# EAGLE board macropad_synthplug (EAGLE 9.6.2)
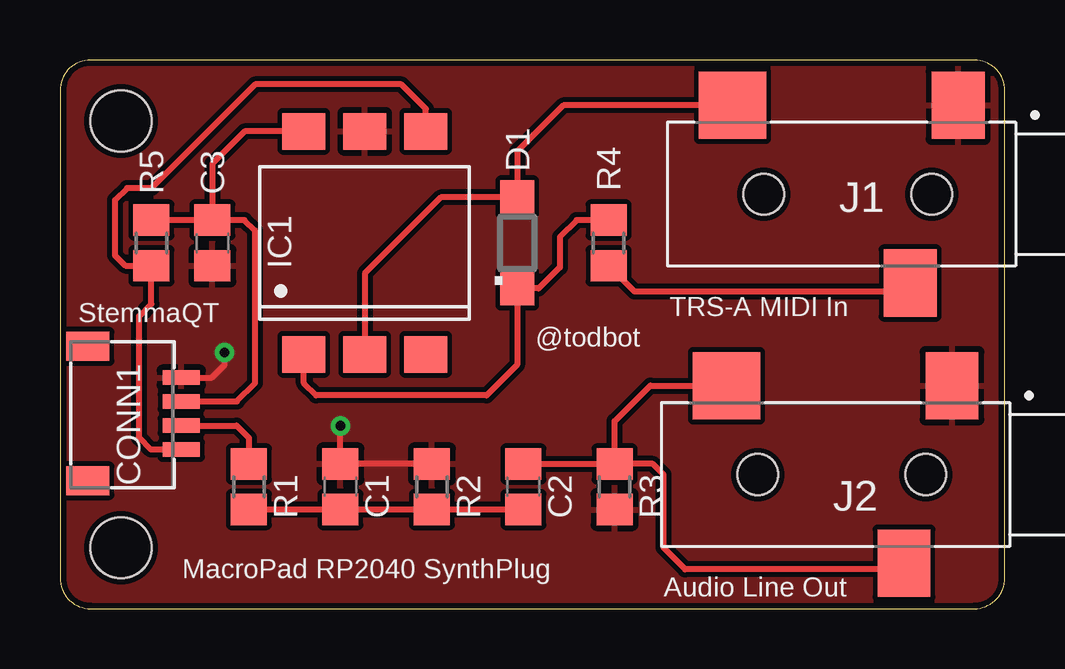
[diagram p0: board, top side]
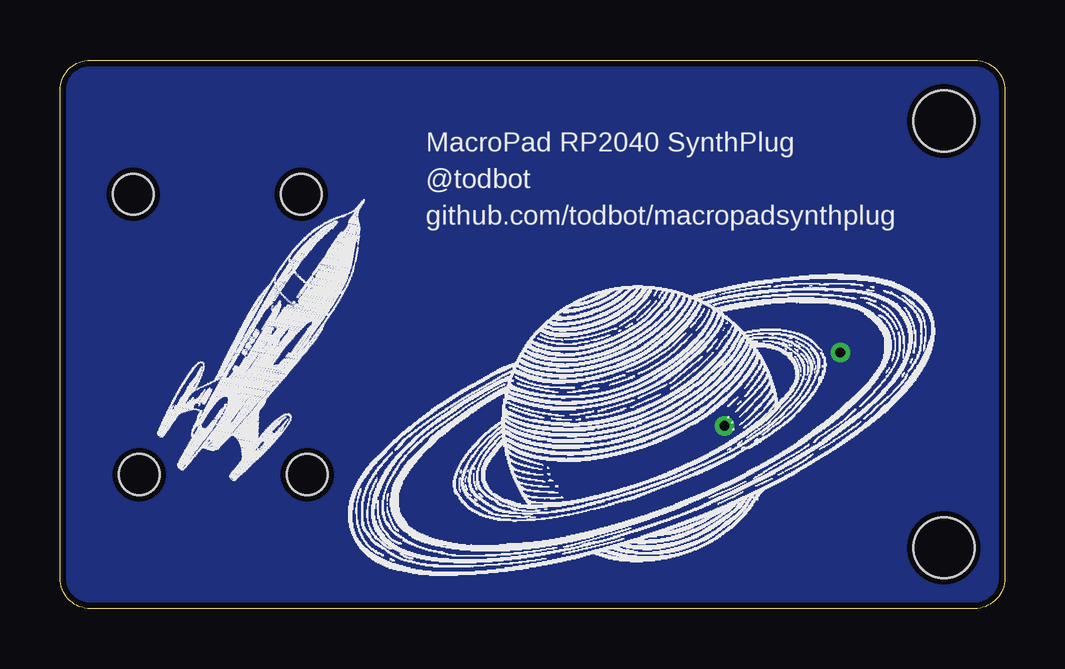
[diagram p1: board, bottom side, seen from below]

Size 39.37 x 22.86 mm. Coordinates in mm from the lower left corner, seen from the top.
Outline: 0,21.59 0,1.27 arc90 1.27,0 38.1,0 arc90 39.37,1.27 39.37,21.59 arc90 38.1,22.86 1.27,22.86 arc90 0,21.59
Copper layers (1*16): Top 0.035mm / dielectric 1.5mm / Bottom 0.035mm
Design rules "adafruit-rules-20180530": minimum track width 8mil, minimum drill 16mil, track to track 8mil, track to pad 8mil, pad to pad 8mil, via to via 8mil, smd to smd 8mil, copper to edge 10mil, drill to drill 8mil, minimum pad ring 10mil, minimum via ring 8mil, stop-mask expansion 4mil, vias tented up to drill 20mil, thermal gap 10mil
Holes 2.54 mm at 2.54,2.54 2.54,20.32

## Footprints (pad centres in the part's own frame; a part is rotated, then mirrored left to right if it is on the bottom)
C0805 = smd 1.3 x 1.5: 1 -0.95,0; 2 0.95,0
JST_SH4 = smd 0.6 x 1.55: 1 -1.5,2.006; 2 -0.5,2.006; 3 0.5,2.006; 4 1.5,2.006 | smd 1.2 x 1.8: MT1 -2.8,-1.894; MT2 2.8,-1.894
SOD123 = smd 1.4 x 1.4: A 1.9,0; C -1.9,0
DIL6-SMD = smd 1.78 x 1.52: 1 -2.54,-4.645; 2 0,-4.645; 3 2.54,-4.645; 4 2.54,4.645; 5 0,4.645; 6 -2.54,4.645
CUI_SJ-3523-SMT = smd 2.2 x 2.8: 1 -1.1,-3.7; 3 0.9,3.7 | smd 2.8 x 2.8: 2 8.3,-3.7 | hole 1.7: 0,0; 7,0
R0805 = smd 1.3 x 1.5: 1 -0.95,0; 2 0.95,0

## Placement (x,y rotation side)
C1  100n  [C0805]  11.68,5.08 90 top
C2  47uF  [C0805]  19.3,5.08 90 top
C3  100n  [C0805]  6.35,15.24 270 top
CONN1  STEMMA_I2C_QT  [JST_SH4]  3.05,8.13 270 top
D1  1N4148  [SOD123]  19.05,15.24 90 top
IC1  H11L1MS  [DIL6-SMD]  12.7,15.24 0 top
J1  SJ-3523-SMT  [CUI_SJ-3523-SMT]  36.32,17.27 180 top
J2  SJ-3523-SMT  [CUI_SJ-3523-SMT]  36.07,5.59 180 top
R1  220  [R0805]  7.87,5.08 90 top
R2  100  [R0805]  15.49,5.08 270 top
R3  1.8k  [R0805]  23.11,5.08 270 top
R4  220  [R0805]  22.86,15.24 270 top
R5  4.70k  [R0805]  3.81,15.24 270 top
U$1  [VINTAGE_SATURN]  27.94,1.27 0 bottom
U$2  [VINTAGE_SPACESHIP_SM1]  35.56,5.84 350 bottom

## Library data of the parts
C1-C3 = rcl; SPICEPREFIX: C
CONN1 = adafruit_electromech; LCSC: C2845363
D1 = diode
IC1 = optocoupler; OC_FARNELL: unknown; OC_NEWARK: unknown
J1 J2 = SJ-3523-SMT; CUI_PURCHASE_URL: https://www.cuidevices.com/product/interconnect/connectors/audio-connectors/jacks/sj-352x-smt-series?utm_source=snapeda.com&utm_medium=referral&utm_campaign=snapedaBOM; DESCRIPTION: 3.5 mm, Stereo, Right Angle, Surface Mount (SMT), 3 Conductors, 0~1 Internal Switches, Audio Jack Connector; DIGI-KEY_PART_NUMBER: CP-3523SJCT-ND; MF: CUI Devices; MP: SJ-3523-SMT-TR; PACKAGE: None; PURCHASE-URL: https://pricing.snapeda.com/search/part/SJ-3523-SMT-TR/?ref=eda
R1-R5 = rcl; SPICEPREFIX: R
U$1 U$2 = tod_art

## Nets
+3V3: C3.1 CONN1.2 IC1.6 R5.1
GND: C1.2 C3.2 CONN1.1 IC1.5 J1.1 J2.1 R2.1 R3.2
MIDI_IN: CONN1.4 IC1.4 R5.2
N$13: D1.C IC1.1 R4.1
N$14: D1.A IC1.2 J1.2
N$15: J1.3 R4.2
N$47: C2.2 J2.2 J2.3 R3.1
N$48: C1.1 C2.1 R1.1 R2.2
PWM_AUDIO: CONN1.3 R1.2

## Tracks (layer width: path | path; a pad name or v marks a point on that pad's centre or on a via)
+3V3
  Top 0.254: CONN1.2 5.06,8.64 7.37,8.64 8.13,9.4 8.13,15.75 7.69,16.19 C3.1 | C3.1 R5.1 | IC1.6 7.69,19.89 6.35,18.54 C3.1
GND  (via drill 0.41)
  Top 0.254: R2.1 C1.2 v11.68,7.62 | CONN1.1 6.33,9.63 6.86,10.16 v6.86,10.67
  pour Top: -1.27,24.89 40.64,24.89 40.64,-0.76 -1.27,-0.76
  pour Bottom: -1.27,24.13 40.64,24.13 40.64,-2.03 -1.27,-2.03
MIDI_IN
  Top 0.254: CONN1.4 3.79,6.63 3.3,7.11 3.3,12.19 3.81,12.7 R5.2 2.73,14.29 2.29,14.73 2.29,17.02 2.79,17.53 3.81,17.53 8.13,21.84 14.22,21.84 15.24,20.83 IC1.4
N$13
  Top 0.254: R4.1 21.52,16.19 20.83,15.49 20.83,14.22 19.94,13.34 D1.C 19.05,10.16 17.78,8.89 10.67,8.89 10.16,9.4 IC1.1
N$14
  Top 0.254: IC1.2 12.7,13.97 15.87,17.14 D1.A 19.05,19.05 20.97,20.97 J1.2
N$15
  Top 0.254: J1.3 35.06,13.21 23.94,13.21 R4.2
N$47
  Top 0.254: C2.2 R3.1 | J2.3 34.91,1.63 26.05,1.63 25.15,2.54 25.15,5.59 24.7,6.03 R3.1 | R3.1 23.11,7.81 24.59,9.29 J2.2
N$48
  Top 0.254: C2.1 R2.2 C1.1 R1.1
PWM_AUDIO
  Top 0.254: CONN1.3 7.36,7.63 7.87,7.11 R1.2

## Text on the board
tPlace: . | StemmaQT | TRS-A MIDI In | @todbot | MacroPad RP2040 SynthPlug | Audio Line Out
bPlace: MacroPad RP2040 SynthPlug | @todbot | github.com/todbot/macropadsynthplug